# EAGLE board AdaptadorAcceso (EAGLE 9.5.2)
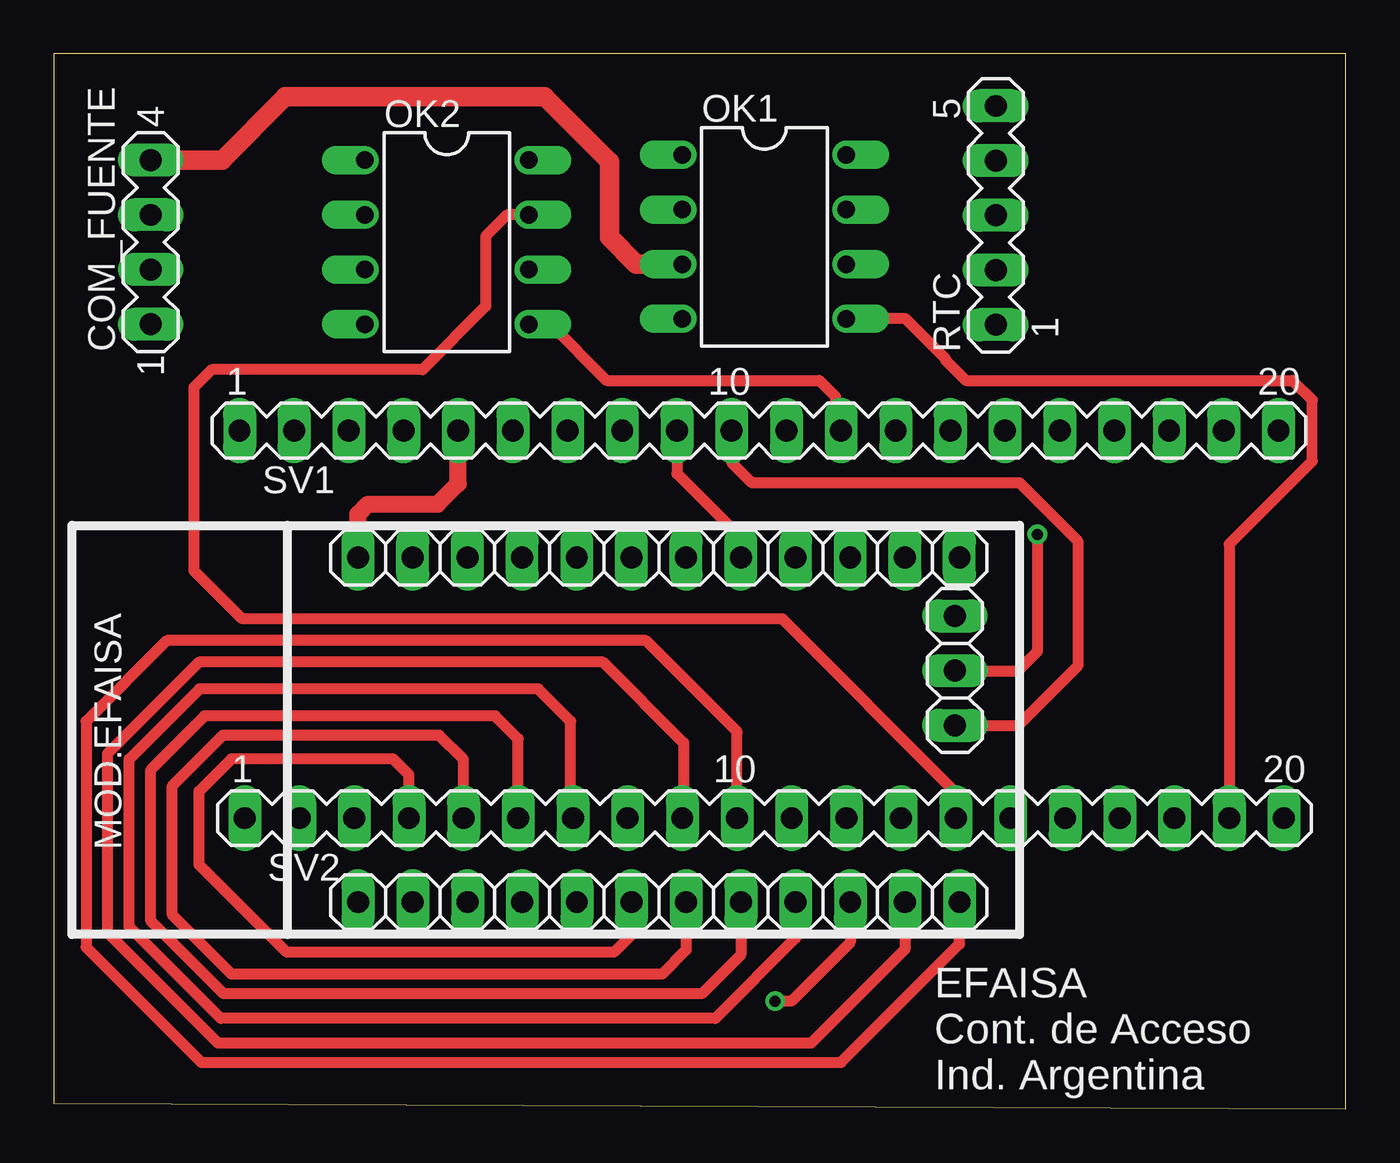
[diagram p0: board, top side]
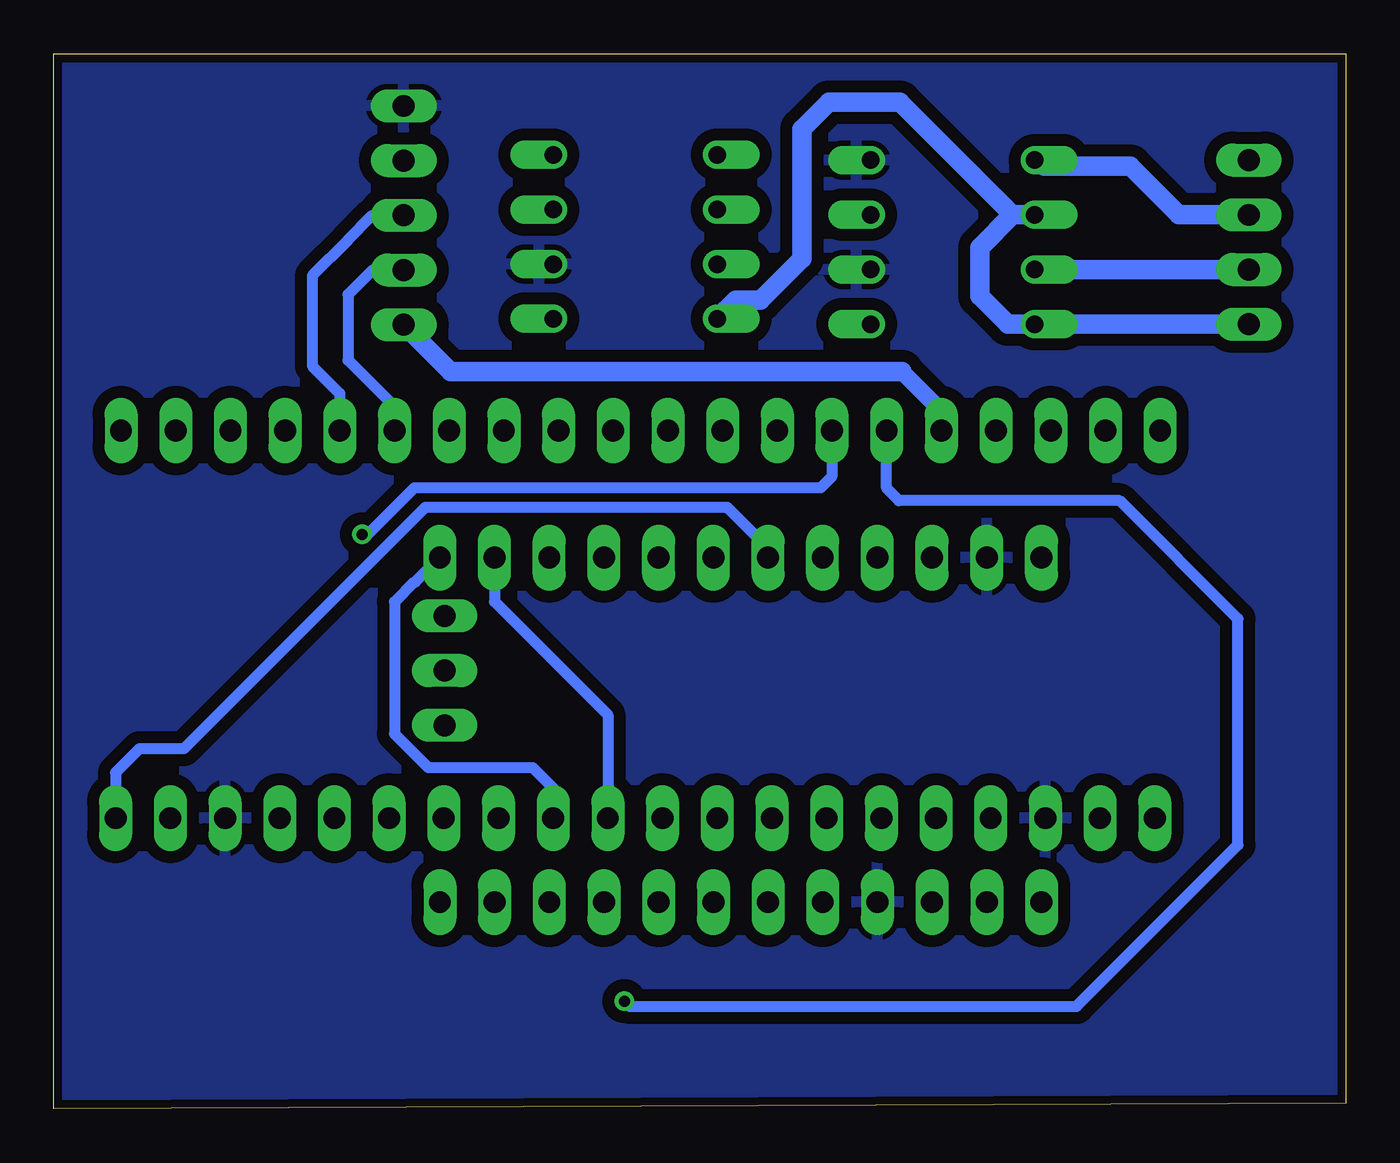
[diagram p1: board, bottom side, seen from below]

Size 60 x 49 mm. Coordinates in mm from the lower left corner, seen from the top.
Outline: 0,0.25 60,0 60,49 0,49 0,0.25
Copper layers (1*16): Top 0.035mm / dielectric 1.5mm / Bottom 0.035mm
Design rules "default *": minimum track width 0.3mm, minimum drill 20mil, track to track 0.4mm, track to pad 0.25mm, pad to pad 0.25mm, via to via 0.25mm, smd to smd 8mil, copper to edge 0.4mm, drill to drill 8mil, minimum pad ring 10mil, minimum via ring 8mil, stop-mask expansion 4mil, vias tented up to drill 0mil, thermal gap 10mil
Net classes: 0 gruesa: width 0.9 mm, drill 0.508 mm, clearance 0.559 mm; 1 normal: width 0.8 mm, drill 0.508 mm, clearance 0.559 mm; 2 fina: width 0.5 mm, drill 0.508 mm, clearance 0.381 mm; 3 Ultra Fina: width 0.4 mm, drill 0.508 mm, clearance 0.254 mm

## Footprints (pad centres in the part's own frame; a part is rotated, then mirrored left to right if it is on the bottom)
MA04-1 = drill 1.016 long: 1 -3.81,0; 2 -1.27,0; 3 1.27,0; 4 3.81,0
1X12 = drill 1.016 long: 1 -13.97,0; 2 -11.43,0; 3 -8.89,0; 4 -6.35,0; 5 -3.81,0; 6 -1.27,0; 7 1.27,0; 8 3.81,0; 9 6.35,0; 10 8.89,0; 11 11.43,0; 12 13.97,0
1X03 = drill 1.016 long: 1 -2.54,0; 2 0,0; 3 2.54,0
DIL08 = drill 0.813 offset: 1 -3.81,-3.81; 2 -1.27,-3.81; 3 1.27,-3.81; 4 3.81,-3.81; 5 3.81,3.81; 6 1.27,3.81; 7 -1.27,3.81; 8 -3.81,3.81
MA05-1 = drill 1.016 long: 1 -5.08,0; 2 -2.54,0; 3 0,0; 4 2.54,0; 5 5.08,0
MA20-1L = drill 1.016 long: 1 24.13,0; 2 21.59,0; 3 19.05,0; 4 16.51,0; 5 13.97,0; 6 11.43,0; 7 8.89,0; 8 6.35,0; 9 3.81,0; 10 1.27,0; 11 -1.27,0; 12 -3.81,0; 13 -6.35,0; 14 -8.89,0; 15 -11.43,0; 16 -13.97,0; 17 -16.51,0; 18 -19.05,0; 19 -21.59,0; 20 -24.13,0

## Placement (x,y rotation side)
COM_FUENTE  [MA04-1]  4.5,40.25 90 top
J1  [1X12]  28.1,25.6 0 top
J4  [1X03]  41.85,20.35 270 top
MOD.EFAISA  [1X12]  28.1,9.6 180 top
OK1  ILD610  [DIL08]  33,40.5 270 top
OK2  ILD610  [DIL08]  18.25,40.25 270 top
RTC  [MA05-1]  43.75,41.5 90 top
SV1  [MA20-1L]  32.75,31.5 180 top
SV2  [MA20-1L]  33,13.5 180 top

## Library data of the parts
COM_FUENTE RTC SV1 SV2 = con-lstb; OC_FARNELL: unknown; OC_NEWARK: unknown
J1 J4 MOD.EFAISA = pinhead
OK1 OK2 = optocoupler; MF: VISHAY/TELEFUNKEN; MPN: ILD610-4; OC_FARNELL: unknown; OC_NEWARK: 20H8702

## Nets
+3V3 [normal]: J1.1 RTC.1 SV1.5
C_OPTO1 [fina]: OK1.5 SV2.19
C_OPTO2 [fina]: OK2.7 SV2.14
C_OPTO3 [fina]: OK2.5 SV1.12
CLOCK_RTC [fina]: RTC.3 SV1.16
DATA_RTC [fina]: RTC.2 SV1.15
GND_FUENTE: COM_FUENTE.1 OK1.4 OK2.2 OK2.4
GNDA [normal]: J1.2 MOD.EFAISA.9 OK1.6 OK2.6 OK2.8 RTC.5 SV2.3 SV2.18
IO16 [fina]: J1.8 SV1.9
IO17 [fina]: J4.2 SV1.7
IO18 [fina]: J4.3 SV1.10
IO21 [fina]: MOD.EFAISA.3 SV1.6
IO33 [fina]: J1.6 SV2.20
IO39 [fina]: J1.12 SV2.12
IO40 [fina]: J1.11 SV2.11
IO41 [fina]: MOD.EFAISA.1 SV2.10
IO42 [fina]: MOD.EFAISA.2 SV2.9
IO45 [fina]: MOD.EFAISA.4 SV2.7
IO46 [fina]: MOD.EFAISA.5 SV2.6
IO47 [fina]: MOD.EFAISA.6 SV2.5
IO48 [fina]: MOD.EFAISA.7 SV2.4
N$1: COM_FUENTE.4 OK1.3
N$2: COM_FUENTE.3 OK2.1
N$3: COM_FUENTE.2 OK2.3

## Tracks (layer width: path | path; a pad name or v marks a point on that pad's centre or on a via)
+3V3
  Top 0.8: J1.1 14.13,27.63 14.58,28.08 17.83,28.08 18.78,29.03 SV1.5
  Bottom 0.8: 20.61,34.23 18.78,32.41 SV1.5
  Bottom 0.9: RTC.1 41.56,34.23 20.61,34.23
C_OPTO1
  Top 0.5: SV2.19 54.59,26.23 58.45,30.09 58.45,32.91 57.53,33.83 42.35,33.83 41.42,34.77 41.42,34.83 39.56,36.69 OK1.5
C_OPTO2
  Top 0.5: OK2.7 21.06,41.52 20.06,40.52 20.06,37.27 17.12,34.33 7.33,34.33 6.5,33.5 6.5,25 8.75,22.75 33.83,22.75 41.83,14.75 41.83,13.56 SV2.14
C_OPTO3
  Top 0.5: OK2.5 23.06,36.44 25.67,33.83 35.55,33.83 36.32,33.07 36.32,31.74 SV1.12
CLOCK_RTC
  Bottom 0.5: RTC.3 45.21,41.5 46.35,40.35 46.34,40.35 48,38.69 48,34.5 46.72,33.22 SV1.16
DATA_RTC
  Bottom 0.5: RTC.2 45.19,38.96 46.33,37.82 46.33,34.77 44.18,32.62 SV1.15
GND_FUENTE
  Bottom 0.9: OK2.2 15.48,41.52 | 15.48,41.52 17,40 17,37.75 15.69,36.44 OK2.4 COM_FUENTE.1 | OK1.4 28.32,37.56 27.18,37.56 25.25,39.49 25.25,45.5 24,46.75 20.71,46.75 15.48,41.52
GNDA
  pour Bottom: 0,49.25 60,49.25 60,0 0,0
IO16
  Top 0.5: SV1.9 28.94,29.5 31.91,26.53 J1.8
IO17  (via drill 0.51)
  Top 0.5: J4.2 41.88,20.32 44.76,20.32 45.68,21.24 v45.68,26.68
  Bottom 0.5: SV1.7 23.86,29.36 24.39,28.83 43.26,28.83 45.41,26.68 v45.68,26.68
IO18
  Top 0.5: J4.3 44.79,17.81 47.58,20.6 47.58,26.34 44.86,29.07 32.43,29.07 31.48,30.02 SV1.10
IO21  (via drill 0.51)
  Top 0.5: MOD.EFAISA.3 36.99,7.74 34.25,5 v33.5,5
  Bottom 0.5: v33.5,5 33.25,4.75 12.5,4.75 5,12.25 5,22.75 10.5,28.25 20.75,28.25 21.32,28.82 SV1.6
IO33
  Bottom 0.5: J1.6 26.83,26.04 28.72,27.93 42.75,27.93 53.97,16.72 56.03,16.72 57.13,15.62 SV2.20
IO39
  Bottom 0.5: J1.12 43.21,24.46 43.26,24.46 44.18,23.54 44.18,17.41 42.6,15.83 37.75,15.83 36.81,14.89 SV2.12
IO40
  Bottom 0.5: J1.11 39.53,23.55 34.27,18.29 SV2.11
IO41
  Top 0.5: SV2.10 31.73,17.48 31.75,17.5 27.5,21.75 5.25,21.75 1.5,18 1.5,7.5 6.85,2.15 36.56,2.15 42.07,7.66 MOD.EFAISA.1
IO42
  Top 0.5: SV2.9 29.25,13.56 29.25,17 25.5,20.75 6.75,20.75 2.5,16.5 2.5,8.18 7.63,3.05 35.17,3.05 39.53,7.41 MOD.EFAISA.2
IO45
  Top 0.5: SV2.7 24,13.61 24,18 22.5,19.5 6.77,19.5 3.5,16.23 3.5,8.45 7.75,4.2 30.72,4.2 34.45,7.93 MOD.EFAISA.4
IO46
  Top 0.5: SV2.6 21.57,17.18 20.5,18.25 7,18.25 4.5,15.75 4.5,8.73 7.88,5.35 30.1,5.35 31.91,7.16 MOD.EFAISA.5
IO47
  Top 0.5: SV2.5 19.03,16.22 17.9,17.35 7.85,17.35 5.5,15 5.5,9 8.25,6.25 28.25,6.25 29.37,7.37 MOD.EFAISA.6
IO48
  Top 0.5: SV2.4 16.49,15.51 15.75,16.25 8.25,16.25 6.75,14.75 6.75,11.33 10.82,7.27 26.02,7.27 26.83,8.08 MOD.EFAISA.7
N$1
  Top 0.9: OK1.3 27.05,39.23 25.8,40.48 25.8,44 22.8,47 10.75,47 7.81,44.06 COM_FUENTE.4
N$2
  Bottom 0.9: COM_FUENTE.3 7.75,41.52 10,43.77 14,43.77 14.29,43.91 OK2.1
N$3
  Bottom 0.9: OK2.3 COM_FUENTE.2

## Text on the board
tPlace: EFAISA / Cont. de Acceso / Ind. Argentina